# Allegro board st-link-v2_pro.brd
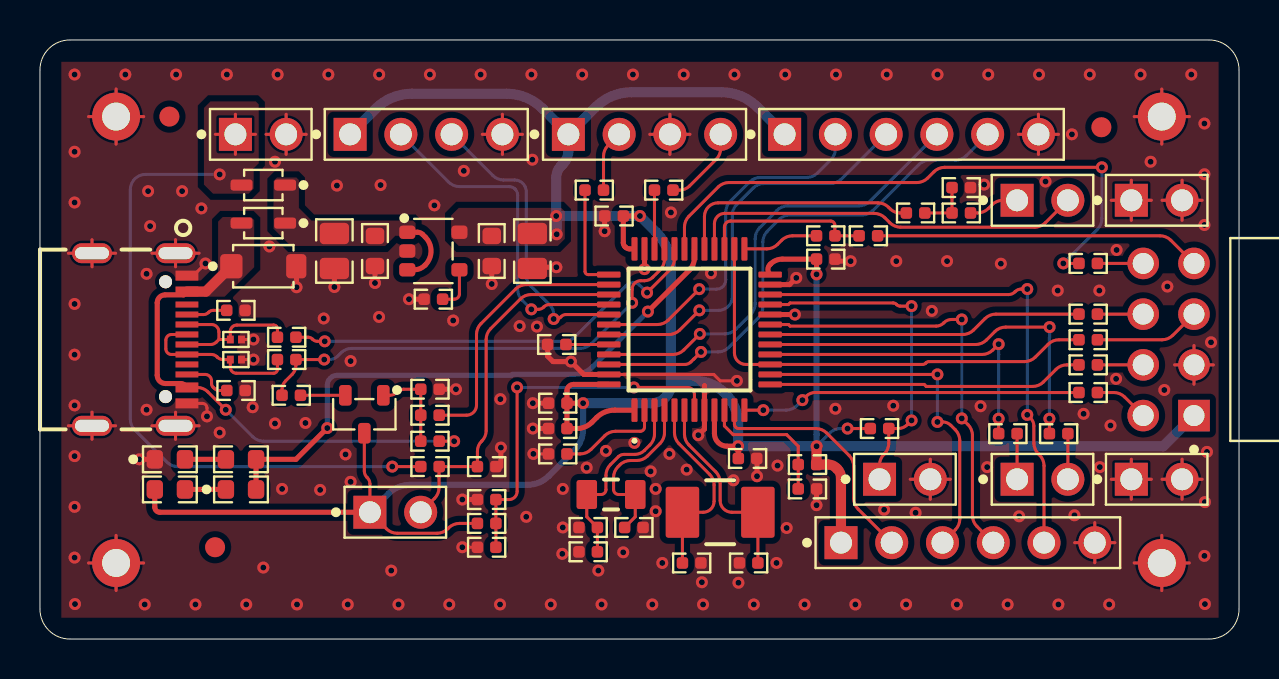
[diagram p0: board, top side]
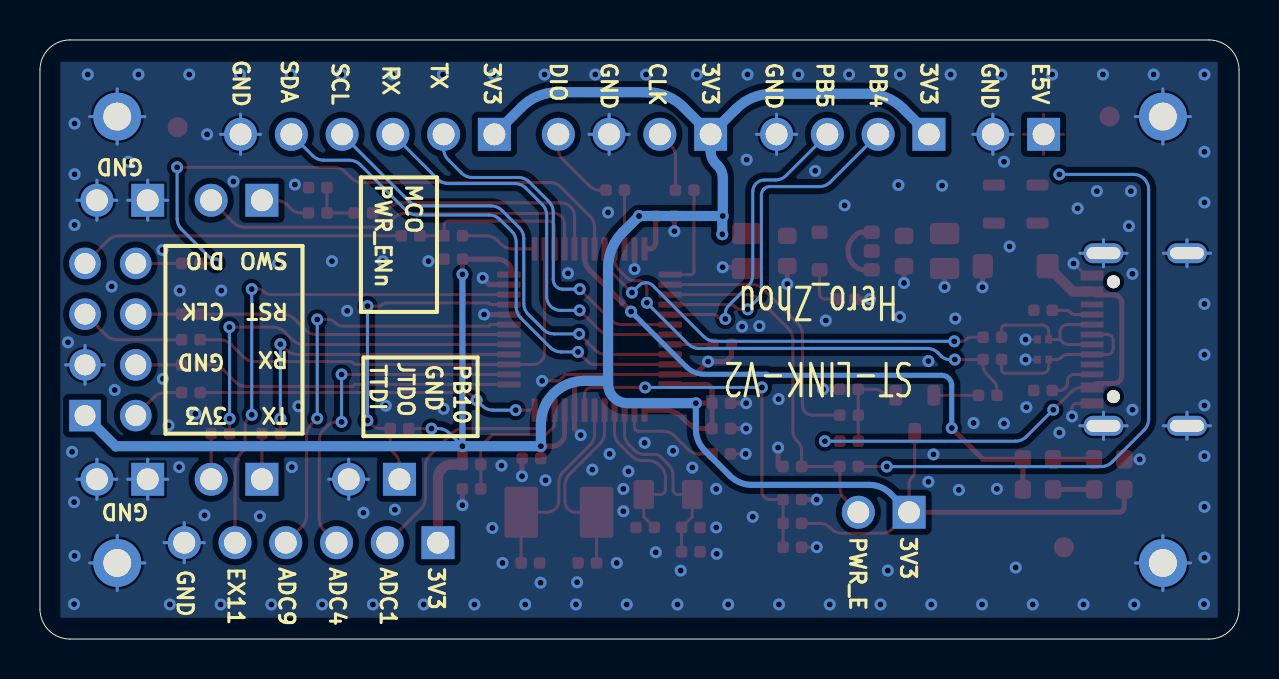
[diagram p1: board, bottom side, seen from below]

Outline 60 x 30 mm; copper layers: TOP, BOTTOM. Coordinates in mm from the lower left corner of the outline.
Outline path: 0,28.5 arc(0.44,29.56) 1.5,30 58.5,30 arc(59.56,29.56) 60,28.5 60,1.5 arc(59.56,0.44) 58.5,0 1.5,0 arc(0.44,0.44) 0,1.5 0,28.5

## Design rules (mm)
constraint set DEFAULT: min track width 0.127

## Placement (name value [footprint] x y rotation side)
C1  20pF,50V  [CAPC100X50X55L25N]  32.61 3.81 180 top
C2  10uF,25V  [CAPC200X125X145L45N]  14.73 19.43 270 top
C3  1uF,25V  [CAPC160X80X90L30N]  16.76 19.43 270 top
C4  10uF,25V  [CAPC200X125X145L45N]  24.64 19.43 270 top
C5  1uF,25V  [CAPC160X80X90L30N]  22.61 19.43 270 top
C6  20pF,50V  [CAPC100X50X55L25N]  35.46 3.81 0 top
C7  1nF,50V  [CAPC100X50X55L25N]  19.68 17.02 180 top
C8  100nF,25V  [CAPC100X50X55L25N]  22.35 6.99 180 top
C9  20pF,50V  [CAPC100X50X55L25N]  27.43 5.59 0 top
C10  20pF,50V  [CAPC100X50X55L25N]  29.72 5.59 180 top
C11  100nF,25V  [CAPC100X50X55L25N]  25.91 11.81 180 top
C12  100nF,25V  [CAPC100X50X55L25N]  35.41 9.04 0 top
C13  100nF,25V  [CAPC100X50X55L25N]  28.73 21.18 180 top
C14  100nF,25V  [CAPC100X50X55L25N]  25.91 10.54 180 top
C15  100nF,25V  [CAPC100X50X55L25N]  39.32 19.02 0 top
C16  20pF,50V  [CAPC100X50X55L25N]  46.1 22.61 180 top
D1  1N4007WS  [SOD265X130X110L32X32N]  11.18 20.83 180 top
D2  1N4007WS  [SOD265X130X110L32X32N]  11.18 22.73 180 top
D3  SMF5.0A  [SODFL370X180X135L60_50X100N]  11.18 18.67 0 top
D4  KLXES15AAA1  [DIONDFN2_100X50X40L32X37N]  9.8 15 180 top
D5  KLXES15AAA1  [DIONDFN2_100X50X40L32X37N]  9.8 14 180 top
D6  Red_LED  [LEDC160X80X70L30N]  6.5 9 0 top
D7  Green_LED  [LEDC160X80X70L30N]  6.5 7.49 180 top
J1  TYPE-C-16P  [USB-C-SMD-16P]  6.78 15 270 top
J2  2x2.54P  [HEADER_2X1_2P54]  9.78 25.27 0 top
J3  2x2.54P  [HEADER_2X1_2P54]  54.61 21.97 0 top
J4  2x2.54P  [HEADER_2X1_2P54]  54.61 8 0 top
J5  2x2.54P(NC)  [HEADER_2X1_2P54]  42.01 8 0 top
J6  2x2.54P  [HEADER_2X1_2P54]  16.51 6.35 0 top
J7  8x2.54P  [HEADER_RA_4X2_2P54]  57.75 11.19 90 top
J8  2x2.54P  [HEADER_2X1_2P54]  48.9 8 0 top
J9  4x2.54P  [HEADER_4X1_2P54]  26.44 25.27 0 top
J10  2x2.54P  [HEADER_2X1_2P54]  48.9 21.97 0 top
J11  6x2.54P  [HEADER_6X1_2P54]  37.26 25.27 0 top
J12  4x2.54P  [HEADER_4X1_2P54]  15.52 25.27 0 top
J13  6x2.54P  [HEADER_6X1_2P54]  40.08 4.83 0 top
NOREF  -  [unnamed]  6.48 26.16 180 top
NOREF#2  -  [unnamed]  8.76 4.6 180 top
NOREF#3  -  [#2]  12.72 0 90 top
NOREF#4  -  [#2]  0 11.62 0 top
NOREF#5  -  [unnamed]  53.11 25.63 180 top
Q1  SS8050  [SOT23-3P95_240X110L53X44N]  16.23 11.26 180 top
R1  4.7k,5%  [RESC100X50X40L25N]  38.4 8.74 180 top
R2  100k,5%  [RESC100X50X40L25N]  22.35 5.79 0 top
R3  5.1k,5%  [RESC100X50X40L25N]  9.8 16.46 180 top
R4  100k,5%  [RESC100X50X40L25N]  25.86 14.75 180 top
R5  4.7k,5%  [RESC100X50X40L25N]  38.4 7.52 0 top
R6  0R,5%  [RESC100X50X40L25N]  22.35 4.6 180 top
R7  5.1k,5%  [RESC100X50X40L25N]  9.81 12.45 180 top
R8  1k,5%  [RESC160X80X55L30N]  10.06 9 180 top
R9  1k,5%  [RESC160X80X55L30N]  10.06 7.49 180 top
R10  0R,5%  [RESC100X50X40L25N]  42.01 10.54 0 top
R11  2.7k,5%  [RESC100X50X40L25N]  19.51 8.64 0 top
R12  10k,5%  [RESC100X50X40L25N]  19.51 9.91 180 top
R13  0R,5%  [RESC100X50X40L25N]  12.34 15.11 0 top
R14  100R,5%  [RESC100X50X40L25N]  19.51 11.21 0 top
R15  4.7k,5%  [RESC100X50X40L25N]  22.35 8.64 0 top
R16  0R,5%  [RESC100X50X40L25N]  12.34 14 0 top
R17  36k,5%  [RESC100X50X40L25N]  19.51 12.51 0 top
R18  1.5k,5%  [RESC100X50X40L25N]  12.57 12.21 0 top
R19  10k,5%  [RESC100X50X40L25N]  27.43 4.37 0 top
R20  10k,5%  [RESC100X50X40L25N]  25.91 9.27 0 top
R21  100R,5%  [RESC100X50X40L25N]  43.81 21.34 0 top
R22  0R,5%  [RESC100X50X40L25N]  46.1 21.34 0 top
R23  100R,5%  [RESC100X50X40L25N]  39.32 20.19 0 top
R24  22R,5%  [RESC100X50X40L25N]  52.45 18.81 0 top
R25  22R,5%  [RESC100X50X40L25N]  41.45 20.19 180 top
R26  22R,5%  [RESC100X50X40L25N]  52.45 16.27 0 top
R27  22R,5%  [RESC100X50X40L25N]  52.45 14.99 180 top
R28  22R,5%  [RESC100X50X40L25N]  48.43 10.29 0 top
R29  0R,5%  [RESC100X50X40L25N]  27.74 22.48 180 top
R30  22R,5%  [RESC100X50X40L25N]  52.45 13.73 0 top
R31  22R,5%  [RESC100X50X40L25N]  50.97 10.29 0 top
R32  22R,5%  [RESC100X50X40L25N]  52.45 12.34 0 top
R33  0R,5%  [RESC100X50X40L25N]  31.21 22.48 180 top
SH1  Screw_Hole_M1.2  [MTGP240H140]  3.81 3.81 0 top
SH2  Screw_Hole_M1.2  [MTGP240H140]  56.13 3.81 0 top
SH3  Screw_Hole_M1.2  [MTGP240H140]  56.13 26.16 0 top
SH4  Screw_Hole_M1.2  [MTGP240H140]  3.81 26.16 0 top
U1  RT9013-33GB  [SOT23-5]  19.68 19.43 270 top
U2  STM32F103CBT6  [QFP50P900X900X145-48N]  32.5 15.5 90 top
Y1  8MHz,10pF  [SMD5032-2P]  34.04 6.35 180 top
Y2  32.768kHz,12.5pF  [SMD3215-2P]  28.57 7.24 180 top

## Library data of the parts
C1 C6 C9 C10 C16 = CAP_20pF_50V_NP0_0402
C2 C4 = CAP_10uF_25V_X5R_0805
C3 C5 = CAP_1uF_25V_X7R_0603
C7 = CAP_1nF_50V_X7R_0402
C8 C11-C15 = CAP_100nF_25V_X5R_0402
D1 D2 = DIODE_1N4007WS_50V_1A_SOD-323
D3 = TVS_S_SMF5.0A_5V_SOD-123FL
D4 D5 = ESD_B_KLXES15AAA1_5V_0402
D6 = LED_Red_0603
D7 = LED_Green_0603
J1 = HC-TYPE-C-16P-01A-O
J2-J6 J8 J10 = HEADER_2X1_2.54P
J7 = HEADER_RA_4X2_2.54P
J9 J12 = HEADER_4X1_2.54P
J11 J13 = HEADER_6X1_2.54P
Q1 = TR_NPN_SS8050_25V_1.5A_SOT-23
R1 R5 R15 = RES_4.7k_5%_0402
R2 R4 = RES_100k_5%_0402
R3 R7 = RES_5.1k_5%_0402
R6 R10 R13 R16 R22 R29 R33 = RES_0R_5%_0402
R8 R9 = RES_1k_5%_0603
R11 = RES_2.7k_5%_0402
R12 R19 R20 = RES_10k_5%_0402
R14 R21 R23 = RES_100R_5%_0402
R17 = RES_36k_5%_0402
R18 = RES_1.5k_5%_0402
R24-R28 R30-R32 = RES_22R_5%_0402
SH1-SH4 = Screw_Hole_M1.2
U1 = RT9013-33GB
U2 = STM32F103CBT6
Y1 = 8MHz_20pF_SMD5032-2P
Y2 = 32.768KHz_12.5pF_SMD3215-2P

## Footprints (pads in the part's own frame, mm; a bottom-side part is the same pattern mirrored in y, then rotated)
CAPC100X50X55L25N
  rrect 0.575x0.58 smd: 1(-0.462,0) 2(0.462,0)
CAPC160X80X90L30N
  rrect 0.82x0.929 smd: 1(-0.755,0) 2(0.755,0)
CAPC200X125X145L45N
  rrect 1.065x1.465 smd: 1(-0.875,0) 2(0.875,0)
DIONDFN2_100X50X40L32X37N
  rect 0.343x0.392 smd: 1(-0.28,0) 2(0.28,0)
HEADER_2X1_2P54
  rect 1.65x1.65 hole 1.1: 1(0,0)
  round 1.65 hole 1.1: 2(2.54,0)
HEADER_4X1_2P54
  rect 1.65x1.65 hole 1.1: 1(0,0)
  round 1.65 hole 1.1: 2(2.54,0) 3(5.08,0) 4(7.62,0)
HEADER_6X1_2P54
  rect 1.65x1.65 hole 1.1: 1(0,0)
  round 1.65 hole 1.1: 2(2.54,0) 3(5.08,0) 4(7.62,0) 5(10.16,0) 6(12.7,0)
HEADER_RA_4X2_2P54
  rect 1.58x1.58 hole 1.05: 1(0,0)
  round 1.58 hole 1.05: 2(0,2.54) 3(2.54,0) 4(2.54,2.54) 5(5.08,0) 6(5.08,2.54) 7(7.62,0) 8(7.62,2.54)
LEDC160X80X70L30N
  rrect 0.82x0.929 smd: A(0.755,0) C(-0.755,0)
MTGP240H140
  round 2.4 hole 1.4: 1(0,0)
QFP50P900X900X145-48N
  rrect 1.175x0.3 smd: 1(-4.038,2.75) 2(-4.038,2.25) 3(-4.038,1.75) 4(-4.038,1.25) 5(-4.038,0.75) 6(-4.038,0.25) 7(-4.038,-0.25) 8(-4.038,-0.75) 9(-4.038,-1.25) 10(-4.038,-1.75) 11(-4.038,-2.25) 12(-4.038,-2.75) 25(4.038,-2.75) 26(4.038,-2.25) 27(4.038,-1.75) 28(4.038,-1.25) 29(4.038,-0.75) 30(4.038,-0.25) 31(4.038,0.25) 32(4.038,0.75) 33(4.038,1.25) 34(4.038,1.75) 35(4.038,2.25) 36(4.038,2.75)
  rrect 0.3x1.175 smd: 13(-2.75,-4.038) 14(-2.25,-4.038) 15(-1.75,-4.038) 16(-1.25,-4.038) 17(-0.75,-4.038) 18(-0.25,-4.038) 19(0.25,-4.038) 20(0.75,-4.038) 21(1.25,-4.038) 22(1.75,-4.038) 23(2.25,-4.038) 24(2.75,-4.038) 37(2.75,4.038) 38(2.25,4.038) 39(1.75,4.038) 40(1.25,4.038) 41(0.75,4.038) 42(0.25,4.038) 43(-0.25,4.038) 44(-0.75,4.038) 45(-1.25,4.038) 46(-1.75,4.038) 47(-2.25,4.038) 48(-2.75,4.038)
RESC100X50X40L25N
  rrect 0.575x0.58 smd: 1(-0.462,0) 2(0.462,0)
RESC160X80X55L30N
  rrect 0.82x0.929 smd: 1(-0.755,0) 2(0.755,0)
SMD3215-2P
  rrect 1.025x1.45 smd: 1(-1.213,0) 2(1.213,0)
SMD5032-2P
  rrect 1.675x2.55 smd: 1(-1.887,0) 2(1.887,0)
SOD265X130X110L32X32N
  rrect 1.099x0.557 smd: A(1.09,0) C(-1.09,0)
SODFL370X180X135L60_50X100N
  rrect 1.015x1.215 smd: A(1.65,0)
  rrect 1.115x1.215 smd: C(-1.6,0)
SOT23-3P95_240X110L53X44N
  rrect 0.629x1.03 smd: 1(-0.95,-0.95) 2(0.95,-0.95) 3(0,0.95)
SOT23-5
  rrect 0.668x0.805 smd: 1(-0.94,-1.304) 2(0,-1.304) 3(0.94,-1.304) 4(0.94,1.304) 5(-0.94,1.304)
unnamed
  round 1 smd: (0,0)
USB-C-SMD-16P
  round 0.65 hole 0.65 unplated: (-2.89,-0.5) (2.86,-0.5)
  oval 1x2 hole 0.6x1.7: 1(-4.32,0) 2(4.32,0) 3(-4.32,-4.18) 4(4.32,-4.18)
  rect 0.5x1.14 smd: A1B12(-3.2,0.57) A4B9(-2.4,0.57) B1A12(3.2,0.57) B4A9(2.4,0.57)
  rect 0.3x1.14 smd: A5(-1.25,0.57) A6(-0.25,0.57) A7(0.25,0.57) A8(1.25,0.57) B5(1.75,0.57) B6(0.75,0.57) B7(-0.75,0.57) B8(-1.75,0.57)

## Nets
3V3_ST: C4.1 C5.1 C11.1 C12.1 C13.1 C14.1 C15.1 D7.A J6.1 J7.1 J9.1 J11.1 J12.1 J13.1 Q1.3 R1.1 R2.1 R10.1 U1.5(VOUT) U2.1 U2.9 U2.24 U2.36 U2.48
GND: C1.1 C2.2 C3.2 C4.2 C5.2 C6.1 C7.2 C8.2 C9.1 C10.1 C11.2 C12.2 C13.2 C14.2 C15.2 C16.1 D3.A D4.1 D5.1 D6.C(CATHODE) J1.1 J1.2 J1.3 J1.4 J1.A1B12 J1.B1A12 J2.2 J3.1 J3.2 J4.1 J4.2 J5.2 J7.3 J9.3 J11.6 J12.4 J13.6 R3.1 R4.2 R5.2 R6.2 R7.1 R15.2 R17.2 R19.1 R20.1 SH1.1(TP) SH2.1(TP) SH3.1(TP) SH4.1(TP) U1.2 U2.8 U2.20 U2.23 U2.35 U2.47(VSS_3)
ADC1_IN1: J13.2 U2.11
ADC1_IN4: J13.3 U2.14
ADC1_IN9: J13.4 U2.19
AIN_1: R1.2 R5.1 U2.10
E5V: D2.A J2.1 R11.1
EXT11: J13.5 U2.22
I2C1_SCL: J11.4 U2.45
I2C1_SDA: J11.5 U2.46
LED_STLINK: R8.1 R9.1 U2.30
MCO: J10.1 R22.2
OSC32_IN: C9.2 R19.2 U2.3 Y2.2
OSC32_OUT: C10.2 U2.4 Y2.1
OSC_IN: C1.2 U2.5 Y1.2
OSC_OUT: C6.2 U2.6 Y1.1
PA8: R21.1 U2.29
PB4: J12.2 U2.40
PB5: J12.3 U2.41
PB10: J5.1 R10.2 U2.21
PWR_ENN: J10.2 U2.28
PWR_EXT: J6.2 R11.2 R15.1 U2.39
ST_BOOT0: R4.1 U2.44
ST_USB_N: R13.2 U2.32
ST_USB_P: R16.2 R18.1 U2.33
STLINK_RX: R30.1 U2.13
STLINK_TX: R32.1 U2.12
STM_JTCK: R29.2 U2.37
STM_JTMS: R33.2 U2.34
STM_RST: C8.1 R2.2 R6.1 U2.7
T_JRST: R26.1 U2.18
T_JTCK: R27.2 U2.15 U2.26
T_JTDI: R31.1 U2.17
T_JTDO: R28.1 U2.16
T_JTMS: R23.2 R25.2 U2.27
T_SWDIO_IN: R23.1 U2.25
T_SWO: R24.1 U2.31
U5V: D1.A D3.C(CATHODE) J1.A4B9 J1.B4A9(VBUS#B4A9) R12.1
USART1_RX: J11.3 U2.43
USART1_TX: J11.2 U2.42
USB_N: D4.2 J1.A7 J1.B7 R13.1
USB_P: D5.2 J1.A6 J1.B6 R16.1
USB_RENUMN: R14.2 U2.38
N01383: Q1.2(E) R18.2
N01643: Q1.1 R12.2 R14.1 R17.1
N02559: C2.1 C3.1 D1.C D2.C U1.1 U1.3
N02991: C7.1 U1.4
N09890: R20.2 U2.2
N15750: C16.2 R21.2 R22.1
N18913: D6.A R8.2
N18917: D7.C(CATHODE) R9.2
N43468: J7.8 R24.2
N43472: J7.6 R26.2
N43480: J7.2 R32.2
N43828: J7.4 R30.2
N44493: J9.4 R33.1
N44516: J9.2 R29.1
N44659: J8.1 R28.2
N44671: J8.2 R31.2
N60144: J7.5 R27.1
N60172: J7.7 R25.1
N62729: J1.A5 R3.2
N62849: J1.B5 R7.2

Pads without a net: J1 A8 B8

## Via types
v1: diameter 0.6, hole 0.3, TOP to BOTTOM, 208 vias

## Routing (per net, layer and track width the routed paths; a pad name or vN(x,y) marks a point on that pad's centre or on a via; arc(x,y) is an arc through that point)
3V3_ST: length 148.8
  TOP w0.152: R10.1 v1(40.41,10.54) ; 21.9,5.79 R2.1 20.99,5.79 arc(20.7,5.73) 20.45,5.57 20.4,5.52 arc(20.16,5.35) 19.87,5.3 17.88,5.3 arc(17.59,5.35) 17.34,5.52 J6.1 16.51,7.77 arc(16.48,7.94) 16.38,8.08 16.36,8.1 arc(16.26,8.24) 16.23,8.41 Q1.3
  TOP w0.254: C11.1 C14.1 26.86,10.54 arc(27.27,10.62) 27.62,10.85 27.85,11.09 arc(28.27,11.37) 28.75,11.46 U2.1 ; C11.1 26.37,12.43 arc(26.47,12.65) 26.69,12.75 U2.48 ; C11.1 v1(27.18,11.81) ; C12.1 34.95,9.65 v1(34.94,9.66) 34.38,9.66 arc(33.93,9.84) 33.75,10.29 U2.9 ; v1(30.02,21.18) C13.1 29.19,19.84 arc(29.21,19.74) 29.27,19.65 29.3,19.62 arc(29.39,19.56) 29.49,19.54 U2.36 ; U2.24 36.53,18.26 arc(36.43,18.5) 36.53,18.75 36.56,18.78 arc(36.83,18.96) 37.15,19.02 C15.1 38.86,19.02 v1(38.86,18.26) ; J6.1 6,6.35 arc(5.82,6.42) 5.75,6.6 D7.A
  TOP w0.508: v1(38.86,9.66) 38.86,9.65 38.86,9.65 38.86,8.74 R1.1 39.44,8.74 arc(39.66,8.69) 39.84,8.57 39.91,8.5 arc(40.04,8.31) 40.08,8.09 J13.1
  BOTTOM w0.152: v1(38.86,9.66) 39.52,10.32 arc(39.77,10.48) 40.06,10.54 v1(40.41,10.54)
  BOTTOM w0.305: v1(38.86,18.26) 38.86,10.24 38.86,10.24 v1(38.86,9.66) ; v1(27.18,11.81) 27.18,10.51 arc(27.06,9.93) 26.73,9.43 25.47,8.17 arc(24.97,7.84) 24.39,7.72 18.51,7.72 arc(17.93,7.61) 17.44,7.28 J6.1
  BOTTOM w0.508: J9.1 27.81,26.64 arc(28.63,27.19) 29.6,27.38 34.1,27.38 arc(35.07,27.19) 35.9,26.64 J11.1 ; J9.1 25.15,26.56 arc(24.33,27.11) 23.36,27.3 18.6,27.3 arc(17.63,27.11) 16.81,26.56 J12.1 ; J9.1 26.44,24.45 arc(26.37,24.1) 26.17,23.8 26.1,23.73 arc(25.9,23.43) 25.83,23.08 v1(25.83,21.18) ; 31.57,12.93 31.57,12.78 arc(31.29,12.09) 30.61,11.81 v1(27.18,11.81) ; 31.57,12.93 31.57,18.59 arc(31.38,19.55) 30.83,20.37 v1(30.02,21.18) v1(25.83,21.18) ; 31.57,12.93 32.77,12.93 arc(34.3,12.29) 34.94,10.76 v1(34.94,9.66) v1(38.86,9.66) 56.2,9.66 56.21,9.65 J7.1 ; v1(25.86,20.27) 25.86,21.16 v1(25.83,21.18)
GND: length 198.1
  TOP w0.152: J3.2 57.15,22.97 ; J3.2 57.15,20.97 ; J3.2 56.15,21.97 ; J3.2 58.15,21.97 ; 30.52,25.27 J9.3 ; J9.3 31.52,26.28 ; J9.3 31.52,24.27 ; J9.3 32.52,25.27 ; 12.32,25.27 13.32,25.27 ; 12.32,25.27 12.32,24.27 ; 12.32,25.27 12.32,26.28 ; 12.32,25.27 11.32,25.27 ; 54.61,7 J4.1 ; J4.1 54.61,9 ; J4.1 53.61,8 ; J4.1 55.61,8 ; v1(24.69,9.27) R20.1 25.45,9.27 ; J3.1 55.61,21.97 ; J3.1 54.61,20.97 ; J3.1 53.61,21.97 ; J3.1 54.61,22.97 ; 6.78,18.64 J1.1 ; J1.1 7.96,19.32 ; J1.1 5.61,19.32 ; J1.1 6.78,20 ; 6.78,10 J1.2 ; J1.2 6.78,11.36 ; J1.2 5.61,10.68 ; J1.2 7.96,10.68 ; 56.13,2.43 SH2.1 ; SH2.1 54.76,3.81 ; SH2.1 56.13,5.19 ; SH2.1 57.51,3.81 ; J7.3 58.71,13.73 ; J7.3 56.78,13.73 ; J7.3 57.75,14.7 ; J7.3 57.75,12.76 ; 56.15,8 J4.2 ; J4.2 57.15,9 ; J4.2 57.15,7 ; J4.2 58.15,8 ; 2.43,26.16 SH4.1 ; SH4.1 3.81,27.54 ; SH4.1 3.81,24.78 ; SH4.1 5.19,26.16 ; 2.43,3.81 SH1.1 ; SH1.1 3.81,5.19 ; SH1.1 5.19,3.81 ; SH1.1 3.81,2.43 ; J1.B1A12 8.13,11.8 arc(8.29,11.73) 8.36,11.57 v1(8.36,11.15) ; J12.4 24.14,25.27 ; J12.4 22.14,25.27 ; J12.4 23.14,24.27 ; J12.4 23.14,26.28 ; SH3.1 57.51,26.16 ; SH3.1 56.13,27.54 ; SH3.1 56.13,24.78 ; SH3.1 54.76,26.16 ; U2.47 33.72,13.25 34.04,12.93 v1(34.87,12.93) ; J1.A1B12 7.67,18.2 v1(8.28,18.81) ; J1.4 2.6,11.36 ; J1.4 2.6,10 ; J1.4 1.43,10.68 ; J1.4 3.78,10.68 ; J5.2 45.55,8 ; J5.2 43.55,8 ; J5.2 44.55,9 ; J5.2 44.55,7 ; J13.6 52.78,5.83 ; J13.6 51.78,4.83 ; J13.6 52.78,3.82 ; J13.6 53.78,4.83 ; 21.9,4.6 R6.2 v1(21.13,4.6) ; 48.96,25.27 J11.6 ; J11.6 49.96,24.27 ; J11.6 50.97,25.27 ; J11.6 49.96,26.28 ; 2.6,18.64 J1.3 ; J1.3 2.6,20 ; J1.3 3.78,19.32 ; J1.3 1.43,19.32 ; D4.1 v1(10.68,15) ; 33.25,12.7 33.25,12.7 ; D5.1 v1(10.68,14)
  TOP w0.254: 16.76,18.78 C3.2 v1(16.76,17.83) ; v1(32.94,10.21) 33.25,10.52 U2.8 33.25,12.7 ; 30.25,19.59 U2.35 v1(30.25,18.52) ; 5.7,9 v1(4.97,9) ; 39.79,19.02 39.89,18.92 v1(40.56,18.92) ; v1(14.73,17.63) C2.2 14.73,18.62 ; v1(37.85,18.08) 37.51,17.75 U2.23 ; 24.64,18.62 v1(25.84,18.62) ; 21.88,6.99 v1(21.13,6.99) ; 19.21,17.02 v1(18.47,17.02) ; U2.47 27.21,13.25 v1(26.57,13.89) 25.67,13.89 25.4,14.17 25.4,14.75 ; 23.06,8.64 v1(23.06,9.59) ; 38.86,7.52 v1(38.86,6.7) ; 35.88,8.92 v1(35.88,8.15) ; 28.25,21.18 v1(28.25,20.42) ; 25.44,10.54 v1(24.66,10.54) ; 22.61,18.78 C5.2 v1(22.61,17.78) ; 12.84,18.67 v1(12.84,17.62) ; v1(20.82,12.51) R17.2 19.97,12.51 ; 25.44,11.81 v1(24.66,11.81) ; U2.20 v1(37.78,16.25)
  BOTTOM w0.152: J9.3 32.52,25.27 ; J9.3 31.52,24.27 ; J9.3 31.52,26.28 ; J9.3 30.52,25.27 ; J5.2 44.55,9 ; J5.2 45.55,8 ; J5.2 44.55,7 ; J5.2 43.55,8 ; 54.76,26.16 SH3.1 ; SH3.1 56.13,27.54 ; SH3.1 57.51,26.16 ; SH3.1 56.13,24.78 ; 5.61,19.32 J1.1 ; J1.1 7.96,19.32 ; J1.1 6.78,18.64 ; J1.1 6.78,20 ; 56.15,21.97 J3.2 ; J3.2 58.15,21.97 ; J3.2 57.15,20.97 ; J3.2 57.15,22.97 ; SH1.1 5.19,3.81 ; SH1.1 3.81,5.19 ; SH1.1 3.81,2.43 ; SH1.1 2.43,3.81 ; J7.3 57.75,14.7 ; J7.3 56.78,13.73 ; J7.3 57.75,12.76 ; J7.3 58.71,13.73 ; J1.2 7.96,10.68 ; J1.2 6.78,11.36 ; J1.2 6.78,10 ; J1.2 5.61,10.68 ; J1.4 3.78,10.68 ; J1.4 2.6,11.36 ; J1.4 1.43,10.68 ; J1.4 2.6,10 ; J4.1 55.61,8 ; J4.1 53.61,8 ; J4.1 54.61,9 ; J4.1 54.61,7 ; J1.3 2.6,20 ; J1.3 1.43,19.32 ; J1.3 3.78,19.32 ; J1.3 2.6,18.64 ; 51.78,4.83 J13.6 ; J13.6 52.78,3.82 ; J13.6 52.78,5.83 ; J13.6 53.78,4.83 ; 56.15,8 J4.2 ; J4.2 57.15,7 ; J4.2 58.15,8 ; J4.2 57.15,9 ; 48.96,25.27 J11.6 ; J11.6 49.96,24.27 ; J11.6 50.97,25.27 ; J11.6 49.96,26.28 ; J12.4 24.14,25.27 ; J12.4 22.14,25.27 ; J12.4 23.14,26.28 ; J12.4 23.14,24.27 ; 3.81,24.78 SH4.1 ; SH4.1 5.19,26.16 ; SH4.1 3.81,27.54 ; SH4.1 2.43,26.16 ; 11.32,25.27 12.32,25.27 ; 12.32,25.27 12.32,26.28 ; 12.32,25.27 13.32,25.27 ; 12.32,25.27 12.32,24.27 ; J3.1 54.61,22.97 ; J3.1 55.61,21.97 ; J3.1 54.61,20.97 ; J3.1 53.61,21.97 ; SH2.1 57.51,3.81 ; SH2.1 54.76,3.81 ; SH2.1 56.13,5.19 ; SH2.1 56.13,2.43
  vias: v1(1.73,28.27) v1(1.73,24.4) v1(1.73,21.86) v1(1.73,16.78) v1(1.73,14.24) v1(1.73,11.7) v1(1.73,9.16) v1(1.73,6.62) v1(1.73,4.08) v1(1.75,1.75) v1(4.27,28.27) v1(5.24,1.73) v1(5.33,18.29) v1(5.33,11.48) v1(5.41,22.43) v1(5.51,20.68) v1(6.81,28.27) v1(7.11,22.43) v1(7.78,1.73) v1(8.08,21.56) v1(8.99,10.34) v1(9.35,28.27) v1(10.32,1.73) v1(10.64,11.61) v1(11.18,3.58) v1(11.48,19.66) v1(11.76,23.9) v1(11.76,10.79) v1(11.89,28.27) v1(12.12,7.52) v1(12.86,1.73) v1(13.28,10.82) v1(14.02,7.47) v1(14.2,16.05) v1(14.43,28.27) v1(14.86,22.71) v1(15.29,9.25) v1(15.4,1.73) v1(15.54,13.92) v1(15.54,7.87) v1(16.97,28.27) v1(17.04,22.73) v1(16.97,16.13) v1(17.58,3.43) v1(17.94,1.73) v1(19.51,28.27) v1(19.74,21.72) v1(20.48,1.73) v1(20.68,15.95) v1(21.21,23.44) v1(22.05,28.27) v1(23.04,12.01) v1(23.02,1.73) v1(24,15.67) v1(24.33,6.12) v1(24.59,28.27) v1(24.64,24) v1(24.87,15.65) v1(25.56,1.73) v1(26.14,4.27) v1(26.16,7.52) v1(26.16,5.59) v1(27.13,28.27) v1(27.36,8.59) v1(27.94,3.43) v1(28.1,1.73) v1(28.32,9.42) v1(29.18,4.34) v1(29.67,28.27) v1(29.74,9.82) v1(30.56,8.4) v1(30.64,1.73) v1(30.81,7.52) v1(30.81,6.4) v1(31.14,3.81) v1(31.5,9.27) v1(31.57,21.36) v1(32.21,28.27) v1(32.36,8.48) v1(33.12,2.84) v1(33.18,1.73) v1(33.58,18.31) v1(34.7,7.95) v1(34.75,28.27) v1(34.95,2.82) v1(35.72,1.73) v1(36.91,8.69) v1(36.86,3.81) v1(37.29,28.27) v1(37.36,5.56) v1(38.26,1.73) v1(39.83,28.27) v1(39.8,11.53) v1(40.8,1.73) v1(42.24,6.48) v1(42.37,28.27) v1(42.7,11.68) v1(42.85,18.92) v1(43.34,1.73) v1(43.81,6.32) v1(44.63,16.43) v1(44.91,28.27) v1(45.39,18.92) v1(45.88,1.73) v1(47.07,11.66) v1(47.24,22.76) v1(47.4,8.61) v1(47.45,28.27) v1(48.08,18.8) v1(48.42,1.73) v1(49,6.15) v1(49.99,28.27) v1(50.32,22.91) v1(50.93,17.45) v1(50.96,1.73) v1(51.64,25.27) v1(51.77,6.2) v1(52.22,11.28) v1(52.53,28.27) v1(53.01,17.45) v1(53.04,8.61) v1(53.5,1.73) v1(53.57,10.69) v1(53.85,13.03) v1(53.87,19.48) v1(55.07,28.27) v1(55.58,23.9) v1(56.26,12.47) v1(56.41,17.65) v1(57.61,28.27) v1(58.27,25.81) v1(58.27,23.27) v1(58.27,20.73) v1(58.29,6.86) v1(58.27,4.17) v1(58.29,1.75) v1(58.39,9.37) v1(58.6,14.86)
ADC1_IN1: length 12.3
  TOP w0.152: U2.11 34.75,10.75 arc(34.76,10.68) 34.8,10.62 34.83,10.6 arc(34.89,10.56) 34.96,10.54 38.83,10.54 arc(39.12,10.48) 39.36,10.32 40.49,9.19 arc(40.66,8.94) 40.72,8.65 40.72,7.05 arc(40.77,6.76) 40.94,6.51 J13.2
ADC1_IN4: length 17.8
  TOP w0.152: U2.14 v1(44.91,13.25) ; J13.3 45.8,5.47 arc(45.97,5.71) 46.02,6.01 46.02,9.94 arc(45.97,10.23) 45.8,10.48 45.58,10.7 arc(45.39,10.83) 45.17,10.87 v1(44.91,10.87)
  BOTTOM w0.152: v1(44.91,10.87) v1(44.91,13.25)
ADC1_IN9: length 21.5
  TOP w0.152: J13.4 46.88,5.64 arc(46.72,5.89) 46.66,6.18 46.66,10.2 arc(46.6,10.49) 46.44,10.74 v1(46.13,11.05) ; v1(46.13,16) 45.61,16 arc(45.41,15.96) 45.24,15.85 45.22,15.83 arc(45.05,15.71) 44.84,15.67 37.54,15.67 37.46,15.75 U2.19
  BOTTOM w0.152: v1(46.13,11.05) v1(46.13,16)
AIN_1: length 7
  TOP w0.152: U2.10 34.25,10.67 34.69,10.24 37.36,10.24 37.94,9.66 R1.2 R5.1
E5V: length 36.1
  TOP w0.152: J2.1 10.78,25.27 ; J2.1 9.78,24.27 ; J2.1 8.78,25.27 ; J2.1 9.78,26.28 ; v1(17.63,8.64) R11.1 19.06,8.64
  BOTTOM w0.152: v1(8.99,23.27) 5.28,23.27 arc(4.74,23.04) 4.52,22.5 4.52,11.01 arc(4.58,10.72) 4.74,10.47 6.36,8.86 arc(6.6,8.69) 6.89,8.64 v1(17.63,8.64)
EXT11: length 25.9
  TOP w0.152: v1(49.4,11.23) 49.58,11.05 arc(49.69,10.88) 49.73,10.68 49.73,9.82 arc(49.79,9.52) 49.96,9.28 50.02,9.21 arc(50.18,8.97) 50.24,8.68 J13.5 ; v1(49.4,17.53) 49.1,17.53 arc(48.94,17.49) 48.8,17.4 48.78,17.38 arc(48.64,17.28) 48.47,17.25 U2.22
  BOTTOM w0.152: v1(49.4,17.53) v1(49.4,11.23)
I2C1_SCL: length 23.1
  TOP w0.152: v1(33.02,15.28) 32.21,14.47 arc(31.97,14.31) 31.67,14.25 U2.45
  BOTTOM w0.152: v1(33.02,15.28) 34.27,15.28 arc(34.57,15.34) 34.81,15.5 35.57,16.26 arc(35.73,16.5) 35.79,16.79 35.79,20.06 arc(35.85,20.35) 36.01,20.59 36.89,21.47 arc(37.13,21.63) 37.43,21.69 40.98,21.69 arc(41.28,21.75) 41.52,21.91 J11.4
I2C1_SDA: length 25.8
  TOP w0.152: v1(33.08,14.38) 32.72,14.02 32.71,14.02 32.57,13.87 arc(32.43,13.78) 32.27,13.75 U2.46
  BOTTOM w0.152: v1(33.08,14.38) 33.92,14.38 arc(34.22,14.43) 34.46,14.6 35.95,16.08 arc(36.11,16.33) 36.17,16.62 36.17,19.88 arc(36.23,20.17) 36.39,20.42 36.99,21.01 arc(37.24,21.18) 37.53,21.23 41.14,21.23 arc(41.43,21.29) 41.68,21.46 43.97,23.75 arc(44.22,23.92) 44.51,23.98 45.81,23.98 arc(46.1,24.04) 46.35,24.2 J11.5
LED_STLINK: length 29.5
  TOP w0.254: R9.1 R8.1 12.81,9 v1(14.38,10.57) ; U2.30 32.75,19.11 arc(32.68,18.76) 32.48,18.46 v1(30.42,16.4)
  BOTTOM w0.254: v1(30.42,16.4) 27.65,13.63 arc(27.24,13.36) 26.75,13.26 23.64,13.26 23.59,13.21 14.88,13.21 arc(14.53,13.06) 14.38,12.7 v1(14.38,10.57)
MCO: length 2.5
  TOP w0.152: R22.2 46.92,21.34 arc(47.21,21.39) 47.46,21.56 47.64,21.75 arc(47.89,21.91) 48.18,21.97 J10.1
OSC32_IN: length 9.6
  TOP w0.152: U2.3 30.75,10.26 arc(30.69,9.97) 30.53,9.72 30.25,9.45 arc(30.03,9.3) 29.76,9.25 29.22,9.25 arc(29.07,9.22) 28.94,9.13 28.54,8.73 arc(28.38,8.48) 28.32,8.19 28.32,7.48 arc(28.25,7.31) 28.08,7.24 Y2.2 27.36,6.12 27.89,5.59 C9.2 R19.2
OSC32_OUT: length 8.5
  TOP w0.152: U2.4 31.25,10.33 arc(31.19,10.04) 31.03,9.79 30.4,9.16 arc(30.15,9) 29.86,8.94 29.55,8.94 arc(29.26,8.88) 29.01,8.72 28.93,8.63 arc(28.76,8.38) 28.7,8.09 28.7,7.49 arc(28.78,7.31) 28.96,7.24 Y2.1 29.79,6.12 29.26,5.59 C10.2
OSC_IN: length 9.8
  TOP w0.152: U2.5 31.75,10.32 arc(31.81,10.03) 31.97,9.78 33.51,8.25 arc(33.67,8) 33.73,7.71 33.73,6.89 arc(33.57,6.51) 33.19,6.35 Y1.2 C1.2
OSC_OUT: length 10
  TOP w0.152: C6.2 Y1.1 34.62,6.35 arc(34.21,6.52) 34.04,6.93 34.04,7.84 arc(33.98,8.13) 33.81,8.38 32.47,9.72 arc(32.31,9.96) 32.25,10.25 U2.6
PA8: length 12.3
  TOP w0.152: R21.1 43.04,21.34 arc(42.77,21.39) 42.55,21.54 42.46,21.62 arc(42.22,21.79) 41.92,21.84 33.93,21.84 arc(33.45,21.64) 33.25,21.16 U2.29
PB4: length 17.1
  TOP w0.152: v1(24.59,16.51) 24.94,16.51 arc(25.08,16.54) 25.2,16.62 25.22,16.64 arc(25.34,16.72) 25.49,16.75 U2.40
  BOTTOM w0.152: v1(24.59,16.51) 24.12,16.97 arc(23.96,17.22) 23.9,17.51 23.9,22.24 arc(23.87,22.39) 23.79,22.52 23.76,22.54 arc(23.63,22.63) 23.48,22.66 20.99,22.66 arc(20.7,22.71) 20.45,22.88 J12.2
PB5: length 14.7
  TOP w0.152: v1(25.7,16.03) 25.85,16.03 arc(25.95,16.05) 26.04,16.11 26.08,16.15 arc(26.19,16.22) 26.32,16.25 U2.41
  BOTTOM w0.152: v1(25.7,16.03) 25.7,16.29 arc(25.66,16.51) 25.54,16.7 24.56,17.68 arc(24.39,17.93) 24.33,18.22 24.33,22.4 arc(24.16,22.82) 23.75,22.99 23.2,22.99 arc(22.91,23.05) 22.66,23.21 J12.3
PB10: length 16.8
  TOP w0.152: v1(43.61,10.95) 43.4,10.73 arc(43.19,10.59) 42.93,10.54 R10.2 42.47,9.8 arc(42.42,9.51) 42.25,9.27 42.23,9.25 arc(42.07,9.01) 42.01,8.72 J5.1 ; U2.21 37.46,16.75 37.54,16.83 42.69,16.83 arc(42.78,16.81) 42.86,16.76 42.88,16.74 arc(42.95,16.69) 43.04,16.67 v1(43.61,16.67)
  BOTTOM w0.152: v1(43.61,10.95) 43.61,11.45 43.61,11.45 v1(43.61,16.67)
PWR_ENN: length 20
  TOP w0.152: J10.2 50.31,20.85 arc(50.06,20.68) 49.77,20.62 43.06,20.62 arc(42.77,20.68) 42.52,20.85 42.28,21.09 arc(42.03,21.26) 41.74,21.32 34.27,21.32 arc(33.9,21.16) 33.75,20.8 U2.28
PWR_EXT: length 18.2
  TOP w0.152: R11.2 R15.1 21.89,9.4 arc(21.94,9.68) 22.1,9.91 22.12,9.93 arc(22.27,10.16) 22.33,10.43 22.33,15 arc(22.38,15.29) 22.55,15.54 24.04,17.03 arc(24.28,17.19) 24.58,17.25 U2.39 ; 19.97,8.64 19.97,7.59 arc(19.91,7.29) 19.75,7.05 J6.2
  TOP w0.254: R11.2 19.97,8.64
ST_BOOT0: length 2.2
  TOP w0.152: U2.44 R4.1 26.31,14.75
ST_USB_N: length 21.7
  TOP w0.152: R13.2 13.41,15.11 arc(13.53,15.09) 13.63,15.02 13.66,15 arc(13.76,14.93) 13.87,14.91 v1(14.25,14.91) ; v1(30.38,17.35) 31.53,18.5 arc(31.69,18.74) 31.75,19.04 U2.32
  BOTTOM w0.152: v1(14.25,14.91) 26.23,14.91 arc(26.52,14.97) 26.77,15.13 29.34,17.7 arc(29.68,17.85) 30.02,17.7 v1(30.38,17.35)
ST_USB_P: length 23.6
  TOP w0.152: R18.1 12.11,12.49 arc(12.16,12.73) 12.29,12.93 12.62,13.26 arc(12.76,13.46) 12.81,13.7 R16.2 v1(14.22,14) ; U2.33 31.25,19.02 arc(31.19,18.73) 31.03,18.48 30.66,18.11 arc(30.47,17.99) 30.25,17.94 30.06,17.94 arc(29.76,17.82) 29.63,17.51 v1(29.63,16.84)
  BOTTOM w0.152: v1(29.63,16.84) 27.57,14.78 arc(27.32,14.61) 27.03,14.55 15.6,14.55 arc(15.31,14.5) 15.06,14.33 14.89,14.16 arc(14.71,14.04) 14.49,14 v1(14.22,14)
STLINK_RX: length 15.9
  TOP w0.152: 52,13.73 R30.1 51.38,13.73 arc(51.09,13.67) 50.84,13.51 50.21,12.87 arc(49.96,12.71) 49.67,12.65 44.35,12.65 44.25,12.75 U2.13
STLINK_TX: length 17.1
  TOP w0.152: 52,12.34 R32.1 38.79,12.34 arc(38.55,12.3) 38.35,12.16 v1(38.15,11.96) ; U2.12 v1(36.2,11.46)
  BOTTOM w0.152: v1(38.15,11.96) 37.87,11.69 arc(37.63,11.52) 37.33,11.46 v1(36.2,11.46)
STM_JTCK: length 5.4
  TOP w0.152: R29.2 27.27,18.4 arc(27.32,18.29) 27.43,18.25 U2.37
STM_JTMS: length 2.9
  TOP w0.152: U2.34 R33.2
STM_RST: length 18.8
  TOP w0.152: R6.1 R2.2 C8.1 23.47,6.99 arc(23.76,7.1) 23.88,7.39 v1(23.88,12.6) ; U2.7 32.75,12.25 arc(32.65,12.5) 32.4,12.6 v1(29.72,12.6)
  BOTTOM w0.152: v1(23.88,12.6) v1(29.72,12.6)
T_JRST: length 15.8
  TOP w0.152: 52,16.27 R26.1 47.83,16.27 arc(47.54,16.21) 47.29,16.05 46.72,15.47 arc(46.47,15.31) 46.18,15.25 U2.18
T_JTCK: length 23.2
  TOP w0.152: 52,14.99 R27.2 50.99,14.99 arc(50.7,14.93) 50.45,14.76 49.8,14.12 arc(49.56,13.95) 49.27,13.89 44.49,13.89 arc(44.41,13.88) 44.34,13.83 44.32,13.81 arc(44.25,13.77) 44.17,13.75 U2.15 35.32,13.75 arc(34.92,13.92) 34.75,14.32 U2.26
T_JTDI: length 19.6
  TOP w0.152: v1(50.52,15.62) 48.32,15.62 arc(48.03,15.56) 47.78,15.4 47.36,14.97 arc(47.11,14.81) 46.82,14.75 U2.17 ; R31.1 v1(50.51,11.03)
  BOTTOM w0.152: v1(50.52,15.62) 50.52,15.11 50.51,15.1 v1(50.51,11.03)
T_JTDO: length 16.1
  TOP w0.152: U2.16 47.14,14.25 arc(47.43,14.31) 47.68,14.47 v1(47.97,14.77) ; R28.1 v1(47.97,11.03)
  BOTTOM w0.152: v1(47.97,11.03) 47.97,14.24 47.97,14.24 v1(47.97,14.77)
T_JTMS: length 8.7
  TOP w0.152: 41,20.19 R25.2 R23.2 39.77,20.19 39.77,20.73 arc(39.71,20.87) 39.57,20.93 34.55,20.93 arc(34.34,20.84) 34.25,20.63 U2.27
T_SWDIO_IN: length 3.8
  TOP w0.152: U2.25 36.37,19.54 arc(36.66,19.6) 36.91,19.76 37.11,19.97 arc(37.36,20.13) 37.65,20.19 R23.1 38.86,20.19
T_SWO: length 29.6
  TOP w0.152: 52,18.81 R24.1 v1(51.21,18.81) ; U2.31 32.25,20.63 arc(32.31,20.92) 32.47,21.17 33.94,22.64 arc(34.19,22.8) 34.48,22.86 43.88,22.86 arc(44.17,22.92) 44.42,23.08 44.73,23.4 arc(44.98,23.56) 45.27,23.62 v1(53.14,23.62)
  BOTTOM w0.152: v1(53.14,23.62) 53.14,21.06 arc(53.08,20.76) 52.91,20.52 v1(51.21,18.81)
U5V: length 25.1
  TOP w0.152: J1.B4A9 7.86,12.6 arc(8.15,12.54) 8.4,12.38 v1(9.3,11.48) ; v1(20.72,9.91) R12.1 19.97,9.91
  TOP w0.254: J1.B4A9 7.24,12.72 arc(7.15,12.77) 7.05,12.8 6.28,12.8 arc(5.99,12.92) 5.87,13.21 5.87,16.84 arc(5.98,17.12) 6.26,17.23 7.19,17.23 J1.A4B9
  TOP w0.508: 9.51,18.67 9.51,18.61 8.31,17.4 J1.A4B9
  BOTTOM w0.152: v1(20.72,9.91) 11.19,9.91 arc(10.89,9.97) 10.65,10.13 v1(9.3,11.48)
USART1_RX: length 20.6
  TOP w0.152: U2.43 31.47,15.25 arc(31.76,15.31) 32.01,15.47 v1(32.99,16.46)
  BOTTOM w0.152: v1(32.99,16.46) 33.96,16.46 arc(34.44,16.66) 34.65,17.14 34.65,21.22 arc(34.7,21.52) 34.87,21.76 35.69,22.59 arc(35.94,22.75) 36.23,22.81 39.56,22.81 arc(39.85,22.87) 40.1,23.03 J11.3
USART1_TX: length 18
  TOP w0.152: v1(32.99,17.52) 31.44,15.97 arc(31.19,15.81) 30.9,15.75 U2.42
  BOTTOM w0.152: v1(32.99,17.52) 33.85,17.52 arc(34.18,17.66) 34.32,17.98 34.32,21.38 arc(34.37,21.67) 34.54,21.91 35.51,22.89 arc(35.76,23.06) 36.05,23.11 38.37,23.11 arc(38.66,23.17) 38.91,23.34 39.58,24.01 arc(39.74,24.26) 39.8,24.55 J11.2
USB_N: length 7.9
  TOP w0.152: J1.B7 8.58,15.75 arc(8.85,15.64) 8.96,15.38 8.96,15 ; 8.96,15 D4.2 9.52,15.4 arc(9.62,15.63) 9.85,15.72 11.7,15.72 arc(11.76,15.71) 11.81,15.68 11.83,15.65 arc(11.87,15.6) 11.88,15.54 R13.1 ; 8.96,15 8.82,14.86 arc(8.69,14.78) 8.54,14.75 J1.A7
USB_P: length 8.6
  TOP w0.152: J1.A6 6.58,15.25 arc(6.38,15.17) 6.3,14.97 6.3,14.53 arc(6.38,14.33) 6.58,14.25 J1.B6 8.58,14.25 arc(8.73,14.22) 8.86,14.13 8.88,14.11 arc(9.01,14.03) 9.16,14 D5.2 9.52,13.61 arc(9.61,13.4) 9.83,13.31 11.69,13.31 arc(11.83,13.37) 11.88,13.5 R16.1
USB_RENUMN: length 13.5
  TOP w0.152: 19.97,11.21 R14.2 21.34,11.21 arc(21.7,11.36) 21.84,11.71 21.84,15.25 arc(21.9,15.55) 22.07,15.79 23.8,17.53 arc(24.05,17.69) 24.34,17.75 U2.38
N01383: length 2.2
  TOP w0.152: R18.2 Q1.2
N01643: length 4.6
  TOP w0.152: Q1.1 17.5,12.21 arc(17.68,12.24) 17.84,12.35 17.86,12.37 arc(18.02,12.47) 18.2,12.51 R17.1 R14.1 R12.2
N02559: length 3.5
  TOP w0.254: U1.1 18.89,20.37 arc(19.03,20.34) 19.14,20.27 19.28,20.13 arc(19.57,19.43) 19.28,18.73 19.25,18.71 arc(19.01,18.55) 18.73,18.49 U1.3
N02991: length 2.2
  TOP w0.152: C7.1 20.73,17.02 arc(20.91,17.09) 20.99,17.28 U1.4
N09890: length 5.3
  TOP w0.152: U2.2 30.25,10.62 arc(30.19,10.47) 30.04,10.4 28.8,10.4 arc(28.51,10.35) 28.26,10.18 27.57,9.49 arc(27.33,9.33) 27.03,9.27 R20.2 26.36,9.27
N15750: length 2.6
  TOP w0.152: C16.2 R22.1 R21.2 44.27,21.34
N18913: length 2
  TOP w0.254: R8.2 D6.A
N18917: length 2
  TOP w0.254: R9.2 D7.C
N43468: length 2.3
  TOP w0.152: J7.8 R24.2 52.91,18.81
N43472: length 2.3
  TOP w0.152: 52.91,16.27 R26.2 J7.6
N43480: length 2.7
  TOP w0.152: 52.91,12.34 R32.2 53.74,12.34 arc(54.03,12.29) 54.27,12.12 J7.2
N43828: length 2.3
  TOP w0.152: J7.4 R30.2 52.91,13.73
N44493: length 4.1
  TOP w0.152: J9.4 34.06,24.56 arc(34,24.27) 33.84,24.02 32.5,22.69 arc(32.27,22.53) 32,22.48 R33.1
N44516: length 3.1
  TOP w0.152: J9.2 28.42,24.71 arc(28.26,24.47) 28.2,24.17 R29.1
N44659: length 2.3
  TOP w0.152: J8.1 R28.2
N44671: length 2.3
  TOP w0.152: J8.2 R31.2
N60144: length 5.3
  TOP w0.152: J7.5 56.69,15.21 arc(56.44,15.04) 56.15,14.99 R27.1 52.91,14.99
N60172: length 16.4
  TOP w0.152: J7.7 56.59,19.97 arc(56.34,20.13) 56.05,20.19 R25.1 41.91,20.19
N62729: length 2.1
  TOP w0.152: J1.A5 8.19,16.25 arc(8.32,16.27) 8.42,16.34 8.44,16.37 arc(8.54,16.43) 8.67,16.46 R3.2 9.35,16.46
N62849: length 2.5
  TOP w0.152: 9.36,12.45 R7.2 8.98,12.45 arc(8.84,12.47) 8.72,12.56 8.66,12.61 arc(8.6,12.7) 8.59,12.79 8.59,12.93 arc(8.49,13.16) 8.26,13.25 J1.B5

## Copper pours and planes (outline as drawn; the poured copper is in the pictures)
3V3_ST on TOP: 20.95,21.59 20.57,21.21 20.57,20.07 20.95,19.68 25.91,19.68 26.26,20.04 26.26,21.41 26.09,21.59
GND on TOP: 1.07,28.91 1.07,1.07 58.98,1.07 58.98,28.91 ; 3 cut-outs
GND on BOTTOM: 1.07,28.91 1.07,1.07 58.98,1.07 58.98,28.91
E5V on TOP: 8.66,22.3 10.44,22.3 10.69,22.56 10.69,23.57 10.95,23.83 10.95,26.77 10.79,26.92 8.53,26.92 8.2,26.59 8.2,22.76
U5V on TOP: 9.14,21.13 10.57,21.13 10.72,20.98 10.72,18.62 9.25,17.14 8.26,17.14 8.18,17.22 8.18,17.65 8.92,18.39 8.92,20.9
N02559 on TOP: 11.86,23.11 11.68,22.94 11.68,20.55 12.55,19.68 17.27,19.68 17.78,20.19 18.67,20.19 18.8,20.32 18.8,20.83 18.67,20.95 13.59,20.95 12.95,21.59 12.95,22.99 12.83,23.11

## Text on the board
Ref Des/Silkscreen Bottom: E5V | GND | 3V3 | PB4 | PWR_E | PB5 | CLK | DIO | PB10 | TX | MCO | JTDO | RX | ADC1 | PWR_ENn | TTDI | SCL | ADC4 | SDA | ADC9 | EX11 | SWO | RST | ST-LINK-V2 | Hero_Zhou
DIMENSION: FIGURE | FINISHED_SIZE | 11.81 | 41.34 | 43.31 | 47.24 | 25.59 | 66.93x23.62 | DRILL CHART: TOP to BOTTOM | ALL UNITS ARE IN MILS | PLATED | NON-PLATED | QTY | 190 | 8 | 34 | 4 | 2
